# EAGLE board Nebula 1.6 (EAGLE 5.11)
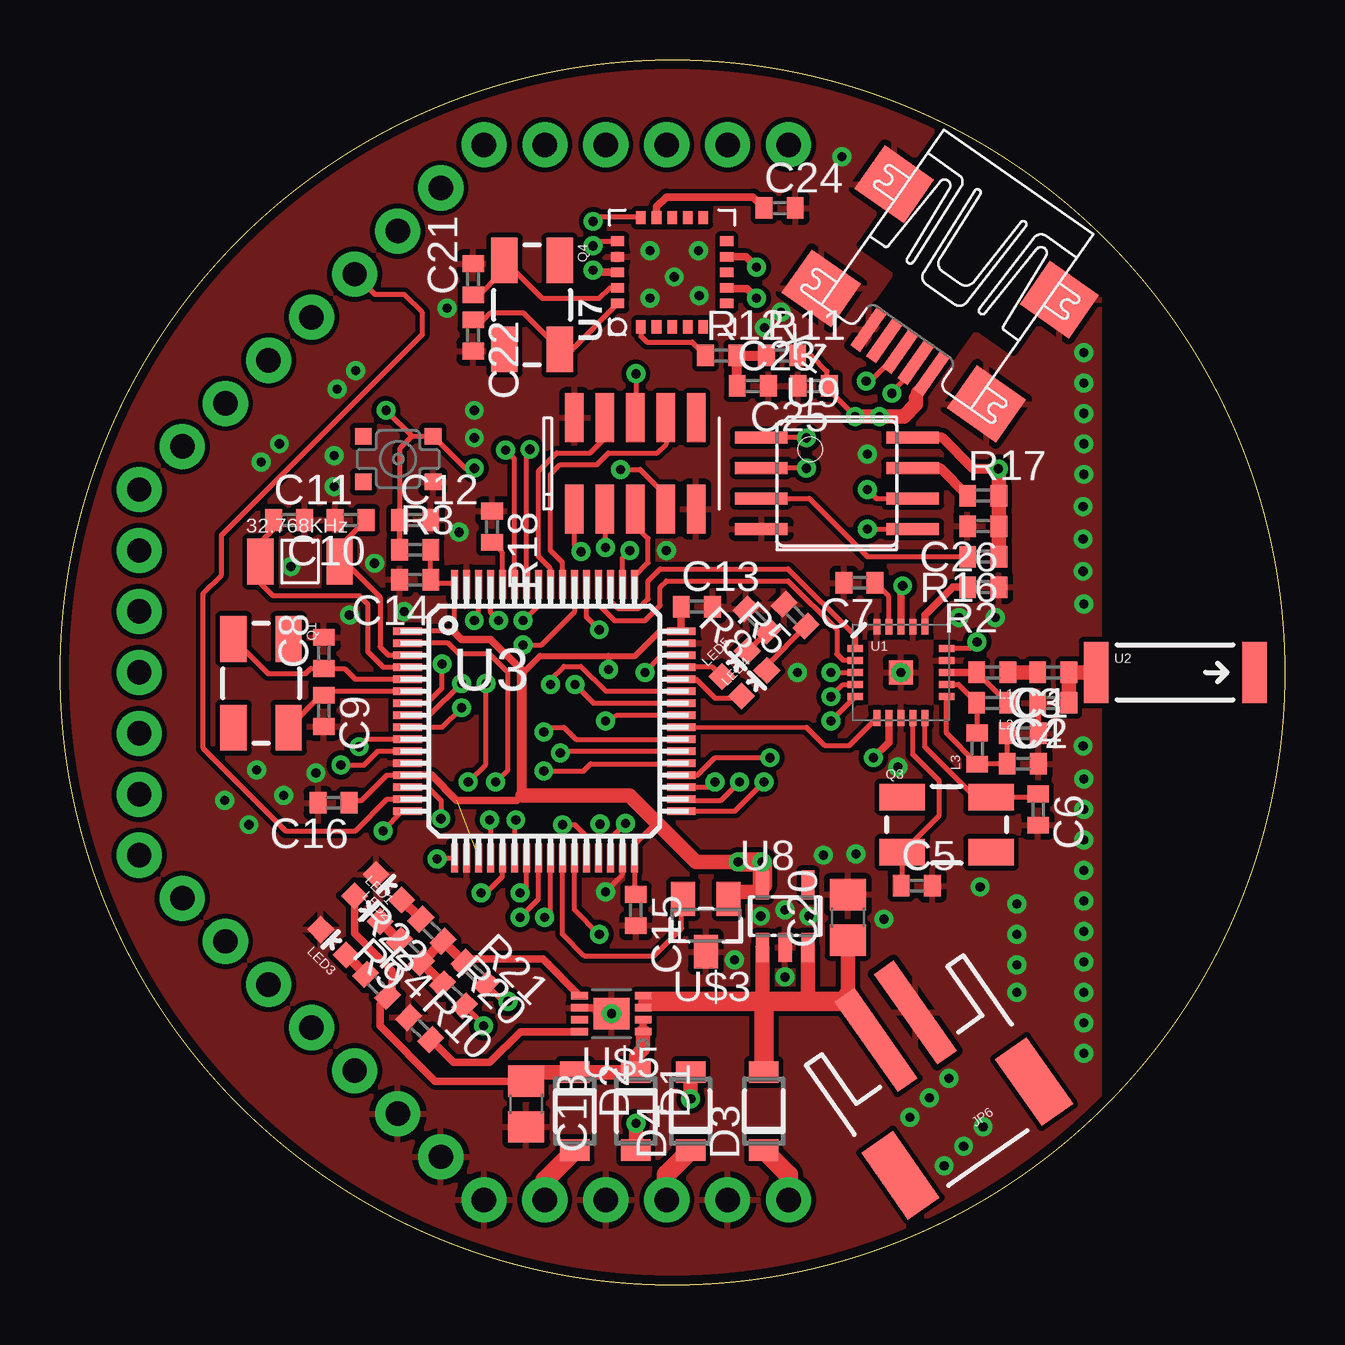
[diagram p0: board, top side]
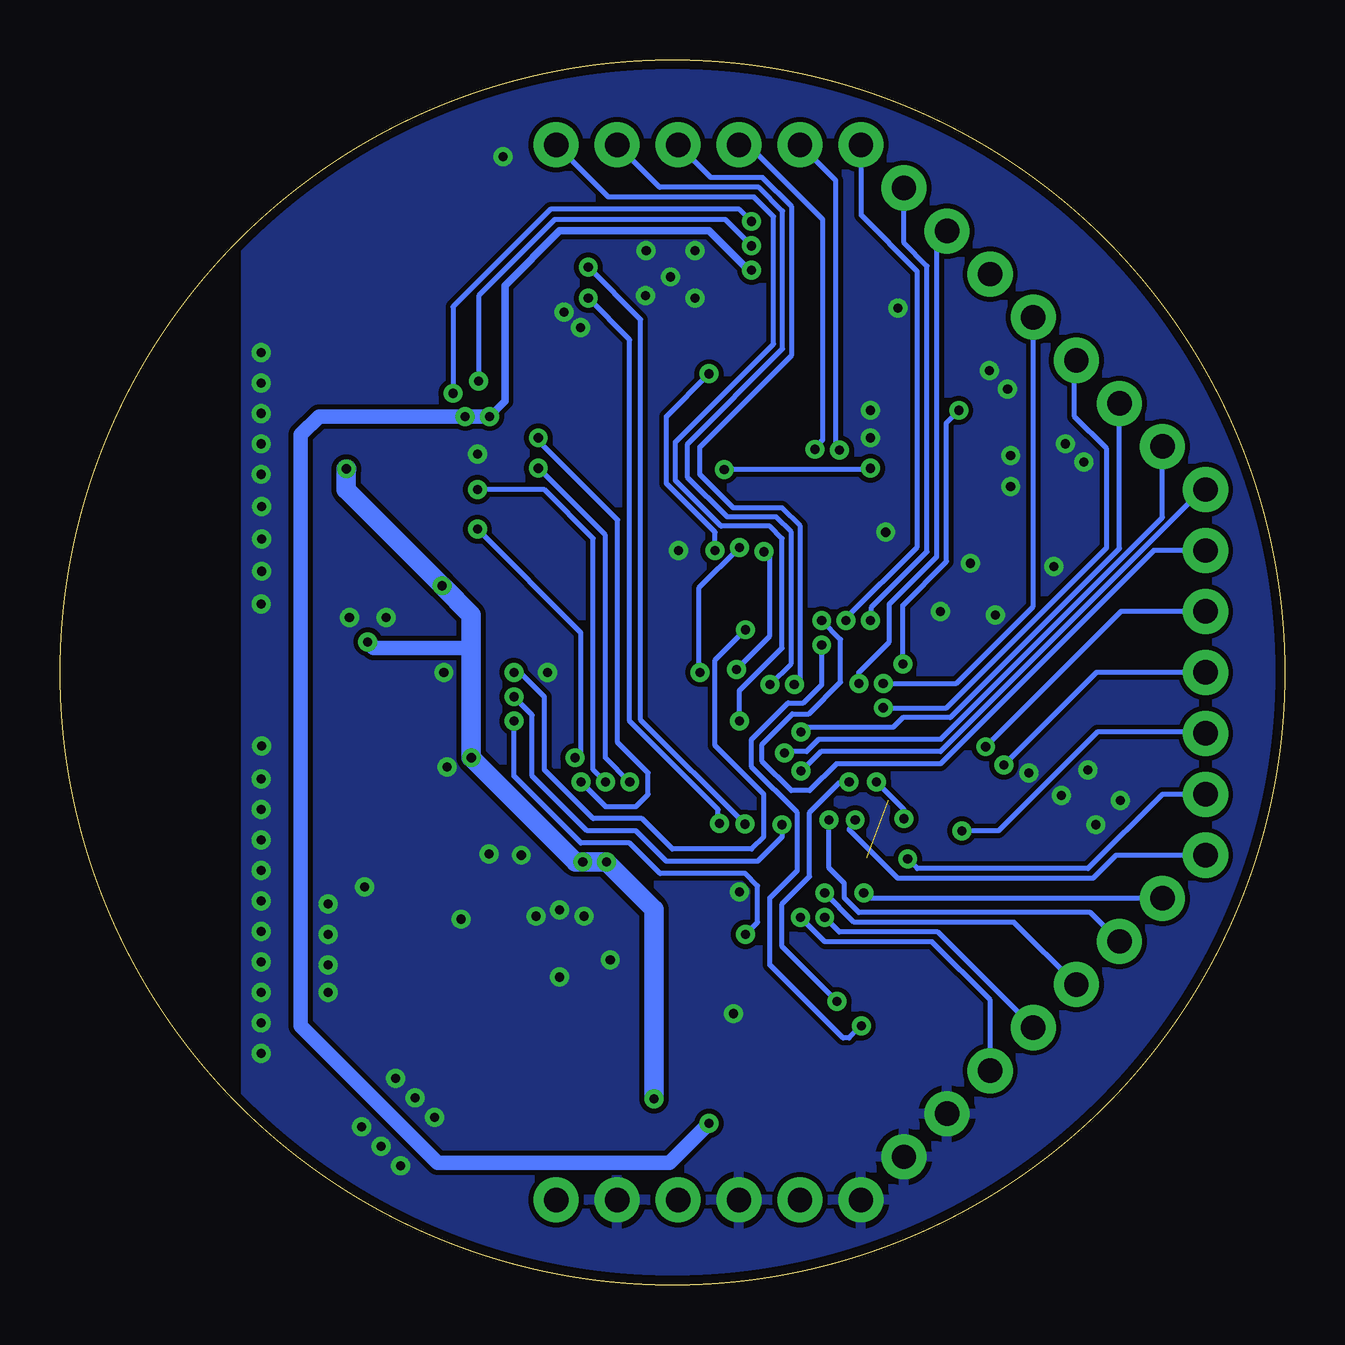
[diagram p1: board, bottom side, seen from below]

Size 51.05 x 51.05 mm. Coordinates in mm from the lower left corner, seen from the top.
Outline: circle at 25.53,25.53 radius 25.53
Copper layers (1*16): Top 0.035mm / dielectric 1.5mm / Bottom 0.035mm
Design rules "PDX (Production)": minimum track width 6mil, minimum drill 15mil, track to track 6mil, track to pad 6mil, pad to pad 4mil, via to via 6mil, smd to smd 4mil, copper to edge 15mil, drill to drill 6mil, minimum pad ring 10mil, minimum via ring 8mil, stop-mask expansion 4mil, vias tented up to drill 25mil, thermal gap 10mil

## Footprints (pad centres in the part's own frame; a part is rotated, then mirrored left to right if it is on the bottom)
C0402 = smd 0.7 x 0.9: 1 -0.65,0; 2 0.65,0
C0805 = smd 1.3 x 1.5: 1 -0.95,0; 2 0.95,0
SOD123FL = smd 0.91 x 1.22: A 1.625,0; C -1.625,0
JST-2-SMD = smd 1 x 4.6: 1 -1,-3.7; 2 1,-3.7 | smd 1.6 x 3.4: NC1 -3.4,1.5; NC2 3.4,1.5
LED-0603 = smd 0.8 x 0.8: A 0,-0.75; C 0,0.75
#NEBULA-PTH@1 = drill 1.016 pad 1.88 round: 3.3V -25.637,-47.388; 5V -30.716,-47.388; A0 -36.848,-7.004; A1 -38.645,-8.8; A2 -40.44,-10.596; A3 -42.237,-12.392; A4 -47.625,-22.86; A5 -47.625,-25.4; A6 -40.44,-40.204; A7 -38.645,-42; BAT -20.557,-47.388; COM1_RX -25.636,-3.412; COM1_TX -23.096,-3.412; COM2_RX -47.625,-30.48; COM2_TX -47.625,-27.94; D0 -47.625,-20.32; D1 -47.625,-17.78; D2 -45.829,-15.984; D3 -44.032,-14.188; DAC1 -47.625,-33.02; DAC2 -45.829,-34.816; GND1 -36.848,-43.796; GND2 -35.052,-45.592; GND3 -33.256,-47.388; GND4 -28.177,-47.388; GND5 -23.097,-47.388; MCO -20.556,-3.412; T0 -28.176,-3.412; T1 -30.716,-3.412; T2 -33.256,-3.412; T3 -35.052,-5.208; TA0 -44.032,-36.612; TA1 -42.237,-38.408
CRYSTAL-SMD-5X3 = smd 1.9 x 1.1: 1 -1.85,-1.15; 2 1.85,-1.15; 3 1.85,1.15; 4 -1.85,1.15
CM415 = smd 1.1 x 1.9: P$1 0,0; P$2 3.3,0
R0402 = smd 0.7 x 0.9: 1 -0.65,0; 2 0.65,0
QFN20 = smd 1 x 1: 0 0,0 | smd 0.65 x 0.3: 1 -1.9,1; 2 -1.9,0.5; 3 -1.9,0; 4 -1.9,-0.5; 5 -1.9,-1; 11 1.9,-1; 12 1.9,-0.5; 13 1.9,0; 14 1.9,0.5; 15 1.9,1 | smd 0.3 x 0.65: 6 -1,-1.9; 7 -0.5,-1.9; 8 0,-1.9; 9 0.5,-1.9; 10 1,-1.9; 16 1,1.9; 17 0.5,1.9; 18 0,1.9; 19 -0.5,1.9; 20 -1,1.9
ANTENNA-CHIP5 = smd 1.016 x 2.54: FEED -3.302,0; NC 3.302,0
S-PQFP64-G64 = smd 1.2 x 0.3: 1 -5.7,3.75; 2 -5.7,3.25; 3 -5.7,2.75; 4 -5.7,2.25; 5 -5.7,1.75; 6 -5.7,1.25; 7 -5.7,0.75; 8 -5.7,0.25; 9 -5.7,-0.25; 10 -5.7,-0.75; 11 -5.7,-1.25; 12 -5.7,-1.75; 13 -5.7,-2.25; 14 -5.7,-2.75; 15 -5.7,-3.25; 16 -5.7,-3.75; 33 5.7,-3.75; 34 5.7,-3.25; 35 5.7,-2.75; 36 5.7,-2.25; 37 5.7,-1.75; 38 5.7,-1.25; 39 5.7,-0.75; 40 5.7,-0.25; 41 5.7,0.25; 42 5.7,0.75; 43 5.7,1.25; 44 5.7,1.75; 45 5.7,2.25; 46 5.7,2.75; 47 5.7,3.25; 48 5.7,3.75 | smd 0.3 x 1.2: 17 -3.75,-5.7; 18 -3.25,-5.7; 19 -2.75,-5.7; 20 -2.25,-5.7; 21 -1.75,-5.7; 22 -1.25,-5.7; 23 -0.75,-5.7; 24 -0.25,-5.7; 25 0.25,-5.7; 26 0.75,-5.7; 27 1.25,-5.7; 28 1.75,-5.7; 29 2.25,-5.7; 30 2.75,-5.7; 31 3.25,-5.7; 32 3.75,-5.7; 49 3.75,5.7; 50 3.25,5.7; 51 2.75,5.7; 52 2.25,5.7; 53 1.75,5.7; 54 1.25,5.7; 55 0.75,5.7; 56 0.25,5.7; 57 -0.25,5.7; 58 -0.75,5.7; 59 -1.25,5.7; 60 -1.75,5.7; 61 -2.25,5.7; 62 -2.75,5.7; 63 -3.25,5.7; 64 -3.75,5.7
QFN-20-5X5 = smd 0.55 x 0.4: P1 0,-0.975; P2 0,-1.625; P3 0,-2.275; P4 0,-2.925; P5 0,-3.575; P11 4.55,-3.575; P12 4.55,-2.925; P13 4.55,-2.275; P14 4.55,-1.625; P15 4.55,-0.975 | smd 0.4 x 0.55: P6 0.975,-4.55; P7 1.625,-4.55; P8 2.275,-4.55; P9 2.925,-4.55; P10 3.575,-4.55; P16 3.575,0; P17 2.925,0; P18 2.275,0; P19 1.625,0; P20 0.975,0
SOT23-5L = smd 0.55 x 1.2: 1 -0.95,-1.3; 2 0,-1.3; 3 0.95,-1.3; 4 0.95,1.3; 5 -0.95,1.3
SOIC8@1 = smd 0.5 x 2.2: 1 -1.905,-3.154; 2 -0.645,-3.154; 3 0.625,-3.154; 4 1.895,-3.154; 5 1.905,3.154; 6 0.635,3.154; 7 -0.635,3.154; 8 -1.905,3.154
STM32-JTAG-10P = smd 0.762 x 2.032: 1 0,0; 2 0,3.81; 3 1.27,0; 4 1.27,3.81; 5 2.54,0; 6 2.54,3.81; 7 3.81,0; 8 3.81,3.81; 9 5.08,0; 10 5.08,3.81
SOT23 = smd 1 x 1.4: 1 -0.95,-1.1; 2 0.95,-1.1; 3 0,1.1
SWITCH-CK-KMT0 = smd 0.7 x 0.7: P1 -1.45,-0.95; P2 1.45,-0.95; P3 1.45,0.95; P4 -1.45,0.95
DFN-2X3 = smd 0.7 x 0.3: 1 -1.325,0.75; 2 -1.325,0.25; 3 -1.325,-0.25; 4 -1.325,-0.75; 5 1.325,-0.75; 6 1.325,-0.25; 7 1.325,0.25; 8 1.325,0.75 | smd 1.5 x 1.3: EXP 0,0
UX60A-MB-5ST = smd 2 x 0.5: 1 2.25,1.6; 2 2.25,0.8; 3 2.25,0; 4 2.25,-0.8; 5 2.25,-1.6 | smd 2.2 x 2.5: M1 -3.3,-4.2; M2 -3.3,4.2; M3 2,4.2; M4 2,-4.2

## Placement (x,y rotation side)
C1  1.5pF  [C0402]  41.4,25.53 180 top
C2  1.0pF  [C0402]  41.4,24.26 180 top
C3  0.0022uF  [C0402]  40.13,22.99 0 top
C4  4.7pF  [C0402]  40.13,21.72 0 top
C5  12.5pF  [C0402]  35.71,16.64 0 top
C6  12.5pF  [C0402]  40.77,19.81 270 top
C7  0.033uF  [C0402]  33.32,29.26 180 top
C8  12.5pF  [C0402]  11,26.34 90 top
C9  12.5pF  [C0402]  11,23.93 270 top
C10  18pF  [C0402]  12.12,31.88 180 top
C11  18pF  [C0402]  9.55,31.88 0 top
C12  220pF  [C0402]  14.81,31.88 0 top
C13  0.1uF  [C0402]  26.54,28.27 0 top
C14  0.1uF  [C0402]  14.81,29.39 180 top
C15  0.1uF  [C0402]  24,15.62 270 top
C16  0.1uF  [C0402]  11.4,20.09 180 top
C18  10uF  [C0805]  19.43,7.54 270 top
C20  10uF  [C0805]  32.84,15.32 90 top
C21  18pF  [C0402]  17.22,41.91 90 top
C22  18pF  [C0402]  17.22,39.57 270 top
C23  0.1uF  [C0402]  28.88,37.47 0 top
C24  0.47uF  [C0402]  30,44.88 0 top
C25  0.1uF  [C0402]  31.42,37.47 180 top
C26  0.1uF  [C0402]  38.48,31.62 180 top
D1  SMF5.0AT1  [SOD123FL]  24,7.24 270 top
D2  SMF5.0AT1  [SOD123FL]  21.46,7.24 270 top
D3  SMF5.0AT1  [SOD123FL]  29.34,7.24 90 top
D4  SMF5.0AT1  [SOD123FL]  26.29,7.24 90 top
INFO3  Warren D Greenway and Evan Teitelman  [CC-BY-SA_]  -2.41,-10.03 0 top  (outside the outline)
JP6  [JST-2-SMD]  36.96,7.75 215 top
L1  3.9nH  [C0402]  38.86,25.53 180 top
L2  8.2nH  [C0402]  38.86,24.26 180 top
L3  2.7nH  [C0402]  38.23,22.35 90 top
LED1  ORANGE  [LED-0603]  12.81,15.68 225 top
LED2  YELLOW  [LED-0603]  13.71,16.58 45 top
LED3  RED  [LED-0603]  11.4,14.28 45 top
LED4  BLUE  [LED-0603]  28.93,25.07 315 top
LED5  GREEN  [LED-0603]  28.12,25.88 315 top
NEBULA1  #NEBULAPTH  [#NEBULA-PTH@1]  50.93,50.93 0 top
NEBULAPART4  #NEBULA-PARTLABELS-BOTTOM  [#NEBULA-LABELS-BOTT]  50.93,50.93 0 top
Q1  12MHz  [CRYSTAL-SMD-5X3]  8.38,25.07 270 top
Q2  CM415  [CM415]  8.36,30.15 0 top
Q3  16MHz  [CRYSTAL-SMD-5X3]  36.96,19.18 0 top
Q4  12MHz  [CRYSTAL-SMD-5X3]  19.68,40.84 270 top
R2  22K  [R0402]  38.48,29.08 180 top
R3  100K  [R0402]  14.81,30.63 0 top
R4  470  [R0402]  13.2,12.48 315 top
R5  470  [R0402]  30.64,27.91 135 top
R8  470  [R0402]  29.05,27.71 135 top
R9  470  [R0402]  14.61,13.89 135 top
R10  2K  [R0402]  14.99,10.68 315 top
R11  10K  [R0402]  30.1,38.73 0 top
R12  470  [R0402]  27.56,38.73 0 top
R16  100K  [R0402]  38.48,30.35 180 top
R17  47K  [R0402]  38.48,32.89 0 top
R18  47K  [R0402]  18.01,31.6 270 top
R20  10K  [R0402]  16.4,12.09 315 top
R21  10K  [R0402]  17.3,12.99 315 top
R22  470  [R0402]  15.5,14.78 135 top
U1  NRF24L01SMD  [QFN20]  35.05,25.53 0 top
U2  ANTENNA2SMD5  [ANTENNA-CHIP5]  46.48,25.53 0 top
U3  STM32F100R4T6B  [S-PQFP64-G64]  20.19,23.5 0 top
U7  MICROCHIP-USB-MCP2200  [QFN-20-5X5]  23.24,39.93 90 top
U8  NCP500  [SOT23-5L]  30.23,15.37 0 top
U9  SST25VF080B  [SOIC8@1]  32.39,33.4 270 top
U$1  STM32-JTAG-10P  [STM32-JTAG-10P]  21.44,32.33 0 top
U$2  [#PYGMYLOGO]  42.04,25.53 0 bottom
U$3  MICROCHIP-TEMP-TC1047  [SOT23]  26.92,14.99 180 top
U$4  SWITCH-CK-KMT0  [SWITCH-CK-KMT0]  14.1,34.42 180 top
U$5  CHARGE-MCP7383X  [DFN-2X3]  22.99,11.3 180 top
X1  MINI-USB-UX60A-MB-5ST  [UX60A-MB-5ST]  36.32,40.77 235 top

## Library data of the parts
C1-C16 C18 C20-C26 R2-R5 R8-R12 R16-R18 R20-R22 = rcl
D1-D4 = diode
INFO3 = EagleLbr
JP6 L1-L3 LED1-LED5 Q1 Q3 Q4 U1 U2 = SparkFun
NEBULA1 NEBULAPART4 = PygmyBoards
Q2 U3 U7-U9 U$3 X1 = dublib
U$1 U$2 U$4 U$5 = Pygmy

## Nets
3.3V: C13.1 C14.1 C15.1 C16.1 C26.1 D4.A R3.2 R16.1 R17.2 U1.7 U1.15 U1.18 U3.1 U3.13 U3.19 U3.32 U3.48 U3.64 U8.5 U9.8 U$1.1 U$3.1
5V: C18.1 D1.C D2.C LED1.A R4.2 U$5.1 U$5.2
A0: NEBULA1.A0 U3.14
A1: NEBULA1.A1 U3.15
A2: NEBULA1.A2 U3.8
A3: NEBULA1.A3 U3.9
A4: NEBULA1.A4 U3.10
A5: NEBULA1.A5 U3.11
A6: NEBULA1.A6 U3.24
A7: NEBULA1.A7 U3.25
BAT: C20.1 D3.A JP6.2 U8.1 U8.3 U$5.3 U$5.4
BAT1: R20.2 U3.54
BAT2: R21.2 U3.2
BOOT0: R18.2 U3.60
COM3_RX: U3.30 U7.P7
COM3_TX: U3.29 U7.P9
D0: NEBULA1.D0 U3.57
D1: NEBULA1.D1 U3.37
D2: NEBULA1.D2 U3.38
D3: NEBULA1.D3 U3.39
DAC1: NEBULA1.DAC1 U3.20
DAC2: NEBULA1.DAC2 U3.21
FLASH_CS: U3.33 U9.1
FLASH_MISO: U3.35 U9.2
FLASH_MOSI: U3.36 U9.5
FLASH_SCK: U3.34 U9.6
GND: C2.2 C3.2 C4.2 C5.2 C6.2 C7.2 C8.2 C9.2 C10.2 C11.2 C12.2 C13.2 C14.2 C15.2 C16.2 C18.2 C20.2 C21.2 C22.2 C23.2 C24.2 C25.2 C26.2 JP6.1 LED2.C LED3.C NEBULA1.GND1 NEBULA1.GND2 NEBULA1.GND3 NEBULA1.GND4 NEBULA1.GND5 R2.1 R5.2 R8.2 R10.1 R18.1 U1.0 U1.8 U1.14 U1.17 U1.20 U3.12 U3.18 U3.31 U3.47 U3.63 U7.P17 U8.2 U9.4 U$1.2 U$1.9 U$3.3 U$4.P4 U$5.6 U$5.EXP X1.5 X1.M1 X1.M2 X1.M3 X1.M4
JTCK: U3.49 U$1.5
JTDI: U3.50 U$1.6
JTDO: U3.55 U$1.8
JTMS: U3.46 U$1.3
JTRST: U3.56 U$1.4
LED0: LED4.A U3.44
LED1: LED5.A U3.45
MCO: NEBULA1.MCO U3.41
N$1: C1.1 C2.1 U2.FEED
N$2: C1.2 L1.1
N$3: L1.2 L2.1 U1.13
N$4: L2.2 L3.2 U1.12
N$5: C3.1 C4.1 L3.1 U1.11
N$6: R17.1 U9.7
N$7: C6.1 Q3.3 U1.10
N$8: C5.1 Q3.1 U1.9
N$9: R10.2 U$5.8
N$10: R2.2 U1.16
N$11: C7.1 U1.19
N$13: R9.1 R20.1 R21.1 R22.1 U$5.5
N$15: LED3.A R4.1
N$16: D3.C NEBULA1.BAT
N$19: C23.1 R11.1 R12.2
N$20: LED2.A R22.2
N$21: C22.1 Q4.3 U7.P20
N$22: C21.1 Q4.1 U7.P19
N$23: LED1.C R9.2
N$24: R12.1 U7.P1
N$26: U7.P15 X1.2
N$28: C24.1 U7.P14
N$29: D4.C NEBULA1.3.3V
N$30: R16.2 U9.3
N$34: C25.1 D1.A R11.2 U7.P18 X1.1
N$35: LED5.C R8.1
N$36: U7.P16 X1.3
N$37: LED4.C R5.1
N$38: D2.A NEBULA1.5V
OSC32_IN: C10.1 Q2.P$2 U3.3
OSC32_OUT: C11.1 Q2.P$1 U3.4
OSC_IN: C8.1 Q1.1 U3.5
OSC_OUT: C9.1 Q1.3 U3.6
RF24_CS: U1.2 U3.52
RF24_EN: U1.1 U3.51
RF24_IRQ: U1.6 U3.40
RF24_MISO: U1.5 U3.27
RF24_MOSI: U1.4 U3.28
RF24_SCK: U1.3 U3.53
RST: C12.1 R3.1 U3.7 U$1.7 U$4.P1
RX1: NEBULA1.COM1_RX U3.43
RX2: NEBULA1.COM2_RX U3.17
T0: NEBULA1.T0 U3.58
T1: NEBULA1.T1 U3.59
T2: NEBULA1.T2 U3.61
T3: NEBULA1.T3 U3.62
TA0: NEBULA1.TA0 U3.22
TA1: NEBULA1.TA1 U3.23
TEMP: U3.26 U$3.2
TX1: NEBULA1.COM1_TX U3.42
TX2: NEBULA1.COM2_TX U3.16

## Tracks (layer width: path | path; a pad name or v marks a point on that pad's centre or on a via)
3.3V  (via drill 0.38)  (1 unrouted)
  Top 0.203: 19.25,20.42 19.25,20.22 | U9.8 35.43,35.2 | 16.44,27.3 U3.64 16.44,29.23 15.62,29.23 C14.1 R3.2 | 16.39,27.25 U3.1 | U1.15 37.96,26.53 v38.23,26.8 | U3.13 13.62,21.25 12.57,20.19 12.16,20.19 C16.1 | 22.86,26.21 v22.86,25.65 | U$1.1 21.44,30.84 v21.72,30.56 | 24.87,19.28 23.94,18.36 U3.32 23.94,16.33 C15.1
  Top 0.254: 19.25,25.6 19.41,25.6 20.02,26.21 22.86,26.21 23.98,26.21 25.02,27.25 25.88,27.25
  Top 0.305: C13.1 U3.48 25.88,27.25 | 19.25,25.6 17.96,26.9 16.74,26.9 16.39,27.25 16.44,27.3 | 19.28,20.4 19.25,20.42 19.02,20.19 16.54,20.19 15.48,21.25 U3.13 | U1.7 34.55,22.61 v33.91,21.97 | U1.18 35.05,29.07 v35.12,29.14
  Top 0.406: 19.25,20.42 19.25,25.6 | U9.8 36.78,35.31 38.08,34.01 v39.12,34.01
  Top 0.61: v26.29,7.75 D4.A | v28.27,17.63 26.52,17.63 24.87,19.28 23.75,20.4 19.28,20.4 | v39.12,34.01 39.13,34 R17.2 C26.1 R16.1 | U$3.1 27.87,16.19 28.07,16.38 28.99,16.38 U8.5
  Top 0.813: v28.27,17.63 v29.26,17.63 29.28,17.61 U8.5
  Bottom 0.203: v22.86,25.65 21.46,27.05 21.46,30.35 21.67,30.56 v21.72,30.56
  Bottom 0.61: v29.26,17.63 28.3,17.63 | v38.23,26.8 37.97,26.54 33.91,26.54
  Bottom 0.813: v39.12,34.01 39.13,34 39.13,33.15 v35.12,29.14 33.91,27.93 33.91,26.54 v33.91,21.97 29.57,17.63 28.3,17.63 v28.27,17.63 26.29,15.65 v26.29,7.75
5V
  Top 0.305: LED1.A 12.28,14.64 13.84,13.08 13.84,12.21 R4.2 13.33,11.7 13.33,10.79 15.64,8.49 C18.1 | U$5.1 U$5.2
  Top 0.61: U$5.1 24.31,9.83 24,9.53 D1.C D2.C 19.8,8.86 C18.1
A0  (via drill 0.38)
  Top 0.203: 14.85,20.75 U3.14 15.32,20.75 15.88,20.19 v15.88,19.43 | v17.75,25.07 17.75,21.69 v17.02,20.95
  Bottom 0.203: NEBULA1.A0 14.5,43.5 14.5,30.35 16.48,28.37 16.48,26.8 17.75,25.53 v17.75,25.07 | v15.88,19.43 15.88,19.81 v17.02,20.95
A1
  Top 0.203: U3.15 13.64,20.25 12.32,18.92 9.4,18.92 5.97,22.35 5.97,28.83 6.73,29.59 6.73,31.24 15.11,39.62 15.11,40.51 14.35,41.28 13.13,41.28 NEBULA1.A1
A2  (via drill 0.38)
  Top 0.203: U3.8 15.41,23.75 v16.74,25.07
  Bottom 0.203: v16.74,25.07 13.69,25.07 10.49,28.27 NEBULA1.A2
A3  (via drill 0.38)
  Top 0.203: U3.9 15.93,23.25 v16.74,24.05
  Bottom 0.203: v16.74,24.05 14.1,24.05 7.42,30.73 7.42,34.85 8.76,36.19 8.76,38.46 NEBULA1.A3
A4  (via drill 0.38)
  Top 0.203: U3.10 12.79,22.75 v12.47,22.43
  Bottom 0.203: NEBULA1.A4 6.83,28.07 v12.47,22.43
A5  (via drill 0.38)
  Top 0.203: U3.11 13.25,22.25 12.67,21.67 v11.71,21.67
  Bottom 0.203: v11.71,21.67 7.85,25.53 NEBULA1.A5
A6  (via drill 0.38)
  Top 0.203: U3.24 19.94,16.08 v19.18,15.32
  Bottom 0.203: v19.18,15.32 18.57,14.71 14.47,14.71 NEBULA1.A6
A7  (via drill 0.38)
  Top 0.203: U3.25 20.44,15.57 v20.19,15.32
  Bottom 0.203: v20.19,15.32 19.18,14.3 14.71,14.3 12.28,11.88 NEBULA1.A7
BAT
  Top 0.203: 34.42,9.53 34.42,9.8 JP6.2 | U$5.3 24.51,11.55 24.77,11.81 | 31.18,12.23 31.18,11.87 31.11,11.81 | 32.88,11.81 32.88,11.85 32.84,11.89
  Top 0.305: JP6.2 34.02,10.64 | U$5.4 24.27,12.05 24.51,11.81
  Top 0.61: 32.84,11.89 32.84,12.06 | 32.84,12.06 C20.1 | 31.18,12.23 U8.3 | 32.84,12.06 32.89,12.06 33.02,11.94 33.02,11.68 33.53,11.18 33.53,10.79 34.02,10.31 JP6.2 | U8.1 29.28,12 29.08,11.81
  Top 0.813: 32.84,12.06 32.74,11.91 | 24.51,11.81 24.77,11.81 29.08,11.81 29.34,11.81 | 29.34,11.81 31.11,11.81 32.88,11.81 | 29.34,11.81 D3.A
BAT1  (via drill 0.38)
  Top 0.203: U3.54 21.46,29.18 21.46,28.07 20.07,26.67 v19.3,26.67 | v17.65,10.79 17.65,10.84 R20.2
  Bottom 0.203: v19.3,26.67 19.3,25.02 20.07,24.26 20.7,24.26 22.23,22.73 22.23,21.59 20.32,19.68 20.32,17.27 21.46,16.13 21.46,13.33 18.41,10.29 18.16,10.29 v17.65,10.79
BAT2  (via drill 0.38)
  Top 0.203: U3.2 16.18,26.75 16.64,26.29 17.91,26.29 18.67,25.53 18.67,21.46 v18.16,20.95 | v18.67,11.81 18.48,11.81 R21.2
  Bottom 0.203: v18.16,20.95 18.54,20.95 19.81,19.68 19.81,17.02 20.95,15.88 20.95,14.1 v18.67,11.81
BOOT0
  Top 0.203: U3.60 18.44,30.51 R18.2
COM3_RX  (via drill 0.38)
  Top 0.203: 27.82,41.53 U7.P7 | U3.30 22.94,18.6 v23.57,19.23
  Top 0.305: 27.82,41.53 28.63,41.53 v29.03,41.12
  Bottom 0.203: v29.03,41.12 27.3,39.39 27.3,23.5 23.62,19.81 23.62,19.28 v23.57,19.23
COM3_TX  (via drill 0.38)
  Top 0.203: U7.P9 | U3.29 22.44,19.14 v22.5,19.2
  Top 0.305: U7.P9 28.6,42.85 v29.03,42.42
  Bottom 0.203: v22.5,19.2 26.85,23.55 26.85,40.23 v29.03,42.42
D0  (via drill 0.38)
  Top 0.203: U3.57 19.94,28.32 v19.3,27.69
  Bottom 0.203: NEBULA1.D0 5.46,30.61 14.35,21.72 18.69,21.72 19.81,20.6 20.57,20.6 21.79,21.82 21.79,22.53 20.52,23.8 19.84,23.8 18.52,25.12 18.52,26.9 v19.3,27.69
D1  (via drill 0.38)
  Top 0.203: U3.37 25.86,21.72 22.12,21.72 21.82,21.41 v20.17,21.41
  Bottom 0.203: v20.17,21.41 20.14,21.41 19.33,22.23 14.35,22.23 3.43,33.15 NEBULA1.D1
D2  (via drill 0.38)
  Top 0.203: U3.38 20.93,22.25 v20.85,22.17
  Bottom 0.203: NEBULA1.D2 5.1,31.99 14.35,22.73 19.43,22.73 19.94,22.23 20.8,22.23 v20.85,22.17
D3  (via drill 0.38)
  Top 0.203: U3.39 25.88,22.73 21.51,22.73 21.01,23.24 20.37,23.24 v20.17,23.04
  Bottom 0.203: v20.17,23.04 19.96,23.24 16.33,23.24 15.93,23.65 13.95,23.65 6.89,30.7 NEBULA1.D3
DAC1  (via drill 0.38)
  Top 0.203: U3.20 17.94,19.16 v17.91,19.38
  Bottom 0.203: v17.91,19.38 18.16,18.97 16.13,16.94 8,16.94 7.04,17.91 NEBULA1.DAC1
DAC2  (via drill 0.38)
  Top 0.203: U3.21 18.44,17.02 17.75,16.33 v17.55,16.33
  Bottom 0.203: v17.55,16.33 17.33,16.11 NEBULA1.DAC2
FLASH_CS  (via drill 0.38)
  Top 0.203: v31.11,35.31 U9.1 | U3.33 28.13,19.75 v29.34,20.95
  Bottom 0.203: v31.11,35.31 31.11,35.18 27.81,31.88 27.81,22.61 26.54,21.34 26.54,20.45 27.05,19.94 28.32,19.94 v29.34,20.95
FLASH_MISO  (via drill 0.38)
  Top 0.203: U3.35 27.09,20.75 v27.3,20.95 | v31.11,34.04 29.24,34.04 U9.2
  Bottom 0.203: v27.3,20.95 28.32,21.97 28.32,31.24 v31.11,34.04
FLASH_MOSI  (via drill 0.38)
  Top 0.203: U3.36 26.58,21.25 27.3,21.97 v29.59,21.97 | v33.66,31.5 U9.5
  Bottom 0.203: v29.59,21.97 29.34,22.23 29.34,27.18 v33.66,31.5
FLASH_SCK  (via drill 0.38)
  Top 0.203: 35.51,32.79 U9.6 34.04,32.77 v33.66,33.15 | U3.34 25.95,20.19 27.56,20.19 v28.32,20.95
  Bottom 0.203: v33.66,33.15 30.86,33.15 28.83,31.11 28.83,21.46 v28.32,20.95
GND  (via drill 0.38)
  Top 0.203: C3.2 40.78,24.23 C2.2 | U3.31 23.44,17.09 v22.73,16.38
  Top 0.305: U$5.6 22.74,11.55 U$5.EXP
  Top 1.016: NEBULA1.GND1 14.08,7.17
  other vias: 39.88,15.88 33.66,34.62 42.67,36.32 42.65,29.74 42.67,37.59 42.67,35.05 42.67,33.78 8.2,21.46 42.65,32.44 42.67,38.86 26.64,41.22 14.35,28.07 17.27,36.45 38.35,16.59 42.65,22.45 42.67,21.08 42.67,19.81 42.67,18.54 42.67,17.27 42.67,16 42.67,14.73 31.83,17.91 42.67,10.92 42.67,12.19 42.67,13.46 42.67,9.65 30.23,15.62 9.32,20.4 38.99,27.81 37.47,27.81 28.12,13.54 29.21,15.37 30.23,12.83 31.22,15.37 16.64,31.37 13.11,30.07 34.34,15.24 39.88,12.19 39.88,14.61 6.86,20.19 29.36,39.9 30.05,40.54 33.17,17.96 35.05,25.53 7.87,19.18 37.06,8.61 36.25,7.8 35.43,6.98 38.48,6.58 37.67,5.77 36.86,4.95 11.43,34.57 17.27,35.31 9.63,29.95 12.06,27.91 24.59,43.1 25.6,42.01 24.59,41.12 26.62,43.1 42.65,31.09 32.59,47.02 39.88,13.33 16.13,40.72 34.92,21.59 30.73,25.53 11.56,37.34 25.27,30.61 10.67,21.34 9.14,35.05 8.38,34.29 12.32,38.1 11.43,33.27 22.99,11.3 42.67,28.37
  pour Top (isolate 0.203): -1.14,52.2 43.31,52.2 43.31,-1.14 -1.14,-1.14
  pour Bottom (isolate 0.203): -2.41,53.47 43.31,53.47 43.31,-2.41 -2.41,-2.41
JTCK
  Top 0.203: 23.93,29.18 U3.49 23.94,29.53 24.51,30.1 24.51,31.11 24,31.62 24,32.31 U$1.5
JTDI  (via drill 0.38)
  Top 0.203: U3.50 23.44,30.3 v23.75,30.61 | v24,37.97 24,36.17 U$1.6
  Bottom 0.203: v23.75,30.61 23.75,31.37 25.78,33.4 25.78,36.19 v24,37.97
JTDO
  Top 0.203: U3.55 20.94,30.11 20.45,30.61 20.45,33.78 20.85,34.19 22.38,34.19 22.86,34.67 24.89,34.67 25.27,35.05 25.27,36.12 U$1.8
JTMS  (via drill 0.38)
  Top 0.203: U3.46 25.1,26.25 v24.38,25.53 | v22.73,30.73 22.73,32.31 U$1.3
  Bottom 0.203: v24.38,25.53 24.41,25.5 24.41,29.06 v22.73,30.73
JTRST
  Top 0.203: U3.56 20.44,29.85 19.94,30.35 19.94,33.91 20.7,34.67 22.1,34.67 22.73,35.31 22.73,35.69 22.73,36.12 U$1.4 22.71,36.3 22.73,36.32 22.73,36.37
LED0
  Top 0.203: U3.44 26.52,25.25 27.3,24.46 28.32,24.46 LED4.A
LED1
  Top 0.203: U3.45 27.2,25.75 LED5.A
MCO  (via drill 0.38)
  Top 0.203: U3.41 25.79,23.75 25.78,23.75 23.24,23.75 v22.73,23.5
  Bottom 0.203: v22.73,23.5 22.73,24.77 20.95,26.54 20.95,31.11 21.46,31.62 23.5,31.62 25.4,33.53 25.4,35.13 21.31,39.22 21.31,44.53 22.12,45.34 28.19,45.34 NEBULA1.MCO
N$1
  Top 0.61: U2.FEED C1.1 C2.1
N$2
  Top 0.61: L1.1 C1.2
N$3
  Top 0.203: 38.21,25.56 L1.2 38.23,25.53 L2.1
  Top 0.305: L1.2 U1.13
N$4
  Top 0.203: U1.12 37.46,25.03 38.23,24.26 L2.2 38.21,23.02 L3.2
N$5
  Top 0.203: C3.1 C4.1 39.47,21.7 L3.1 36.95,22.99 U1.11
N$6
  Top 0.406: U9.7 36.69,34.04 R17.1
N$7
  Top 0.203: C6.1 40.63,20.33 Q3.3 38.74,20.4 38.08,20.4 36.05,22.42 U1.10
N$8
  Top 0.203: U1.9 35.55,22.11 36.65,21.01 36.65,19.57 Q3.1 35.11,16.68 C5.1
N$9
  Top 0.305: U$5.8 19.19,10.55 17.91,9.27 16.4,9.27 R10.2
N$10
  Top 0.305: U1.16 36.05,27.92 37.21,29.08 R2.2
N$11
  Top 0.203: U1.19 34.55,28.68 C7.1
N$13
  Top 0.305: 16.89,13.59 20.13,13.59 U$5.5
  Top 0.406: R22.1 | R22.1 R21.1 16.59,13.28 16.89,13.59 | R20.1 R9.1 | R9.1 | R9.1 R22.1
N$15
  Top 0.406: R4.1 | LED3.A R4.1
N$16
  Top 0.813: NEBULA1.BAT 30.37,4.58 D3.C
N$19
  Top 0.203: 28.21,37.69 28.23,37.67 C23.1
  Top 0.406: 28.21,37.69 R12.2 R11.1
N$20
  Top 0.406: LED2.A | R22.2 LED2.A
N$21
  Top 0.203: U7.P20 21.34,38.99 Q4.3 19.3,40.51 17.96,40.51 17.67,40.22 C22.1
N$22
  Top 0.203: U7.P19 22.91,41.55 22.48,41.12 20.1,41.12 Q4.1 18.36,42.53 18.36,42.14 17.49,41.26 C21.1
N$23
  Top 0.406: R9.2 LED1.C
N$24
  Top 0.203: 24.22,39.79 U7.P1 24.22,39.54 24.46,39.29 26.35,39.29 R12.1
N$26  (via drill 0.38)
  Top 0.203: v34.67,37.16 34.92,37.41 34.92,37.47 35.69,38.23 X1.2 | U7.P15 24.17,44.53 22.43,44.53 v22.23,44.32
  Bottom 0.203: v34.67,37.16 34.67,40.77 30.61,44.83 22.73,44.83 v22.23,44.32
N$28
  Top 0.305: U7.P14 24.87,44.93 25.27,45.34 28.89,45.34 C24.1
N$29
  Top 0.813: NEBULA1.3.3V 25.29,4.61 D4.C
N$30
  Top 0.203: U9.3 31.23,32.78 33.66,30.35 R16.2
N$34  (via drill 0.38)
  Top 0.203: R11.2 31.32,38.73 31.98,38.08 31.98,37.56 C25.1 32.07,37.27 v33.15,36.19 | 35.94,37.47 35.94,37.61 X1.1
  Top 0.305: U7.P18 22.31,42.2 v22.23,42.29
  Top 0.406: 35.69,36.96 35.69,37.21 35.94,37.47
  Top 0.61: v33.15,36.19 v34.16,36.19 35.18,36.19 35.69,36.7 35.69,36.96 | D1.A v24,6.73
  Bottom 0.305: v22.23,42.29 22.35,42.29 24,43.94 30.23,43.94 32.51,41.66 32.51,36.83 v33.15,36.19
  Bottom 0.61: v24,6.73 25.65,5.08 35.31,5.08 41.02,10.79 41.02,35.43 40.26,36.19 v34.16,36.19 v33.15,36.19
N$35
  Top 0.203: LED5.C 28.67,26.41 R8.1
N$36  (via drill 0.38)
  Top 0.203: X1.3 33.78,37.67 v33.6,37.67 | U7.P16 22.42,43.5 v22.23,43.31
  Bottom 0.203: v22.23,43.31 23.32,44.4 30.43,44.4 33.6,41.22 v33.6,37.67
N$37
  Top 0.203: LED4.C 29.46,25.82 R5.1
N$38
  Top 0.813: NEBULA1.5V 20.21,4.36 D2.A
OSC32_IN
  Top 0.203: U3.3 13.68,26.25 13.33,26.59 13.33,28.68 11.86,30.15 Q2.P$2 11.66,30.77 C10.1
OSC32_OUT
  Top 0.203: U3.4 13.47,25.75 12.83,26.39 12.83,28.37 12.47,28.73 8.87,28.73 8.38,29.21 8.38,30.12 Q2.P$1 8.25,30.25 8.25,30.86 8.9,31.51 C11.1
OSC_IN
  Top 0.203: U3.5 12.3,25.25 11.86,25.68 11.01,25.68 C8.1 10.45,25.69 10.24,25.48 8.68,25.48 Q1.1
OSC_OUT
  Top 0.203: U3.6 11.17,24.75 C9.1 10.89,24.58 Q1.3
RF24_CS
  Top 0.203: U3.52 22.44,28.36 23.11,27.69 24.38,27.69 25.02,28.32 25.02,29.08 25.27,29.34 30.35,29.34 32.39,27.3 32.39,26.29 32.64,26.04 33.14,26.04 U1.2
RF24_EN
  Top 0.203: U3.51 22.94,28.49 23.24,28.19 24.13,28.19 24.51,28.57 24.51,29.34 25.02,29.85 30.35,29.85 33.15,27.05 U1.1
RF24_IRQ
  Top 0.203: U3.40 31.11,23.24 31.87,22.48 32.91,22.48 U1.6
RF24_MISO  (via drill 0.38)
  Top 0.203: 33.14,24.51 U1.5 32.63,24 v32.13,23.5 | U3.27 21.44,15.64 v22.48,14.61
  Bottom 0.203: v22.48,14.61 21.97,15.11 21.97,16.64 22.48,17.14 26.04,17.14 27.3,18.41 29.34,18.41 32.13,21.21 v32.13,23.5
RF24_MOSI  (via drill 0.38)
  Top 0.203: v32.13,24.51 32.64,25.02 33.14,25.02 U1.4 | U3.28 21.94,18.7 21.46,19.18 v20.95,19.18
  Bottom 0.203: v20.95,19.18 20.95,18.67 21.97,17.65 25.78,17.65 27.05,18.92 29.08,18.92 31.37,21.21 31.37,23.75 v32.13,24.51
RF24_SCK  (via drill 0.38)
  Top 0.203: U3.53 21.94,27.84 v22.48,27.3 | v32.13,25.53 U1.3
  Bottom 0.203: v32.13,25.53 31.88,25.53 30.86,24.51 30.86,21.46 28.83,19.43 26.8,19.43 25.53,18.16 22.23,18.16 21.72,18.67 21.72,20.45 23.75,22.48 23.75,26.04 v22.48,27.3
RST  (via drill 0.38)
  Top 0.203: U3.7 15.3,24.25 15.93,24.87 v15.93,25.88 | 14.16,32.37 C12.1 R3.1 14.16,34.85 14.67,35.37 | U$1.7 25.25,32.92 24.18,33.98 v23.37,33.98 | v17.27,34.04 16.88,34.04 U$4.P1 14.67,35.37 | v13.59,36.45 14.67,35.37
  Bottom 0.203: v15.93,25.88 15.93,28.32 14.1,30.15 14.1,35.94 v13.59,36.45 | v23.37,33.98 17.37,33.98 v17.27,34.04
RX1  (via drill 0.38)
  Top 0.203: U3.43 22.75,24.75 21.72,25.78 21.01,25.78 20.45,25.22 v20.45,25.02
  Bottom 0.203: NEBULA1.COM1_RX 23.93,46.15 21.77,46.15 20.55,44.93 20.55,38.76 24.38,34.92 24.38,33.78 22.99,32.39 20.95,32.39 20.19,31.62 20.19,25.27 v20.45,25.02
RX2  (via drill 0.38)
  Top 0.203: U3.17 15.76,17.79 v15.72,17.75
  Bottom 0.203: NEBULA1.COM2_RX 5.1,20.45 8.2,17.35 15.32,17.35 v15.72,17.75
T0  (via drill 0.38)
  Top 0.203: U3.58 19.44,34.68 v19.58,34.82
  Bottom 0.203: NEBULA1.T0 22.37,47.52 19.25,44.4 19.25,35.23 19.58,34.9 v19.58,34.82
T1  (via drill 0.38)
  Top 0.203: U3.59 18.94,34.42 v18.57,34.8
  Bottom 0.203: NEBULA1.T1 18.72,46.02 18.72,34.95 v18.57,34.8
T2  (via drill 0.38)
  Top 0.203: U3.61 17.94,28.03 v18.29,27.69
  Bottom 0.203: NEBULA1.T2 17.65,47.5 17.65,44.58 15.32,42.24 15.32,30.76 18.29,27.79 v18.29,27.69
T3  (via drill 0.38)
  Top 0.203: U3.62 17.44,27.86 v17.27,27.69
  Bottom 0.203: NEBULA1.T3 15.88,43.43 14.91,42.47 14.91,30.56 17.22,28.25 17.22,27.74 v17.27,27.69 | NEBULA1.T3
TA0  (via drill 0.38)
  Top 0.203: U3.22 18.94,19.07 v19,19.38
  Bottom 0.203: v19,19.38 19,17.37 18.36,16.74 18.36,16.13 17.75,15.52 8.1,15.52 NEBULA1.TA0
TA1  (via drill 0.38)
  Top 0.203: U3.23 19.44,16.6 v19.18,16.33
  Bottom 0.203: v19.18,16.33 17.96,15.11 11.29,15.11 NEBULA1.TA1
TEMP
  Top 0.203: U3.26 20.94,14.62 21.84,13.72 24.77,13.72 25.91,14.86 25.91,16.15 U$3.2
TX1  (via drill 0.38)
  Top 0.203: U3.42 22.24,24.25 v21.46,25.02
  Bottom 0.203: NEBULA1.COM1_TX 26.06,45.75 21.92,45.75 20.93,44.75 20.93,39.01 24.89,35.05 24.89,33.66 23.24,32 21.21,32 20.57,31.37 20.57,25.91 v21.46,25.02
TX2  (via drill 0.38)
  Top 0.203: U3.16 14.28,19.75 v13.46,18.92
  Bottom 0.203: NEBULA1.COM2_TX 3.35,23.04 7.82,23.04 11.94,18.92 v13.46,18.92

## Text on the board
_bsilk: Pygmy Nebula | Version 1 | Designed By | Warren D Greenway | Evan Teitelman